# Altium PCB Driver PCB v1.0.PcbDoc
Units mil, origin at the board's own origin, x right, y up, seen from the top; angles counter-clockwise.
Board outline 6000 x 4000 mil, 2 copper layers (Top Layer, Bottom Layer); 18 components, 66 nets, 36 pads, 0 vias.
Unrouted connection lines stored in the file: 32.
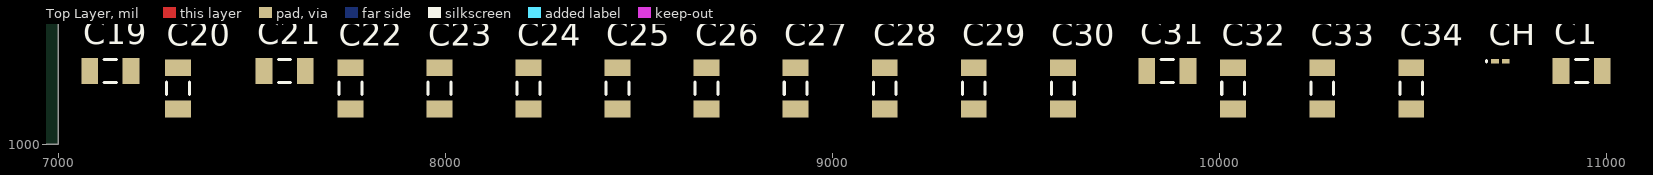
[diagram p0: Top Layer view]
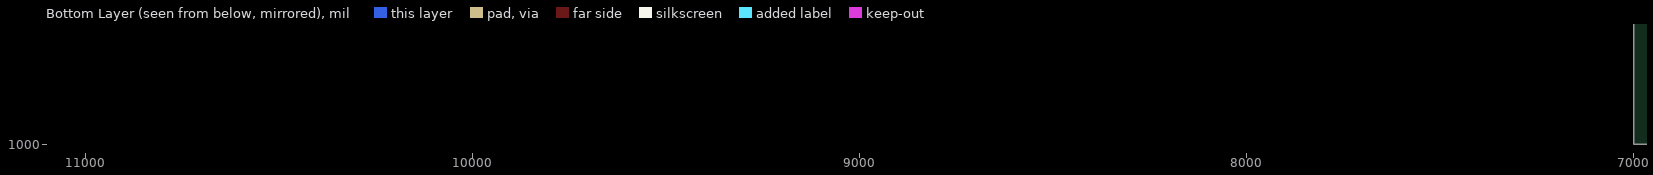
[diagram p1: Bottom Layer view, seen from below]

## Layer stack, top to bottom
Top Solder: solder mask 0.4, Solder Resist, Dk 3.5
Top Layer: signal copper 1.4
Dielectric 1: dielectric 12.6, FR-4, Dk 4.8
Bottom Layer: signal copper 1.4
Bottom Solder: solder mask 0.4, Solder Resist, Dk 3.5

## Board outline
1000,1000 7000,1000 7000,5000 1000,5000

## Design rules (kind name [scope] priority, off if disabled: settings)
Clearance [All] p1: gap=10 ignorepadtopadclearanceinfootprint=FALSE except(0: Arc-Hole Track-Hole SMDPad-Hole THPad-Hole Via-Hole Fill-Hole Poly-Hole Region-Hole Text-Hole)
PolygonConnect [All] p1: connectstyle=Relief reliefconductorwidth=10 reliefentries=4 polygonreliefangle="90 Angle" airgapwidth=10
RoomDefinition "Driver Schematic v1.1" [InComponentClass('Driver Schematic v1.1')] p1: confinementstyle=ConfineIn formatcopy=TRUE lockcomponents=FALSE outline 7045,1055 11025,1055 11025,1335 7045,1335
RoutingVias [All] p1: holewidth=28 width=50 viastyle="Through Hole" minholewidth=28 minwidth=50 maxholewidth=28 maxwidth=50
SolderMaskExpansion [All] p1: expansion=4 istentingtop=FALSE
Width [All] p1: maxlimit=10 minlimit=10 preferedwidth=10
30 further rules are at their usual default settings.

## Components (designator, comment, footprint, x,y, rotation, side; value= is the part's Value field where it differs from the comment)
C1 "10uF" C1206 10935,1190 r0 top
C19 "10uF" C1206 7135,1190 r0 top
C20 "10uF" C1206 7310,1145 r90 top
C21 "10uF" C1206 7585,1190 r0 top
C22 "10uF" C1206 7755,1145 r90 top
C23 "10uF" C1206 7985,1145 r90 top
C24 "10uF" C1206 8215,1145 r90 top
C25 "10uF" C1206 8445,1145 r90 top
C26 "10uF" C1206 8675,1145 r90 top
C27 "10uF" C1206 8905,1145 r90 top
C28 "10uF" C1206 9135,1145 r90 top
C29 "10uF" C1206 9365,1145 r90 top
C30 "10uF" C1206 9595,1145 r90 top
C31 "10uF" C1206 9865,1190 r0 top
C32 "10uF" C1206 10035,1145 r90 top
C33 "10uF" C1206 10265,1145 r90 top
C34 "10uF" C1206 10495,1145 r90 top
CH "600r" 0603 10725,1215 r0 top

## Footprints (in the part's own frame and the unit in brackets; to place one, negate y for a bottom-side part, rotate by r counter-clockwise, add the part's x,y. Pads: shape width x height; smd on the part's side, far side on the other; paste and mask are expansions set on the pad)
0603 [mm] "Chip Inductor, Body 0.6x0.3mm, IPC High Density"
  rect 0.5x0.3 smd: 1(-0.35,0) 2(0.35,0)
  silkscreen extent -0.9,-0.05 -0.9,0.05, body extent -0.33,-0.18 0.33,0.18, height 0.55
C1206 [mm] "Chip Capacitor, Body 3.2x1.6mm, IPC High Density"
  rect 1.1x1.7 smd: 1(-1.35,0) 2(1.35,0)
  silkscreen extent -0.4,-0.75 0.4,0.75, body extent -1.7,-0.9 1.7,0.9, height 1.3

## Nets (pads, with @x,y where several pads share a name; then routed paths per layer and width w, separated by ;. In a path a pad name is that pad's centre, name@x,y a point inside that pad or via, vN(x,y) a via of type N, cw(c..) or ccw(c..) an arc to the next point about the centre after c; other vN are vias at no path point)
3V3: CH.1
+5V: 
+24V: C1.1 C19.1 C20.1 C21.1 C22.1 C23.1 C24.1 C25.1 C26.1 C27.1 C28.1 C29.1 C30.1 C31.1 C32.1 C33.1 C34.1
CAL: 
GND: C1.2 C19.2 C20.2 C21.2 C22.2 C23.2 C24.2 C25.2 C26.2 C27.2 C28.2 C29.2 C30.2 C31.2 C32.2 C33.2 C34.2
I_A: 
I_B: 
MCO: 
NetC3_1: CH.2
NetC4_1: 
NetC4_2: 
NetC6_1: 
NetC6_2: 
NetC8_1: 
NetC11_2: 
NetC12_2: 
NetCAN1_1: 
NetCAN1_2: 
NetCAN1_3: 
NetLED1_1: 
NetLED2_1: 
NetPROG_1: 
NetPROG_2: 
NetPROG_4: 
NetPROG_5: 
NetPROG_6: 
NetPROG_7: 
NetQ1_1: 
NetQ1_4: 
NetQ2_1: 
NetQ2_4: 
NetQ3_1: 
NetQ3_4: 
NetQ4_1: 
NetQ4_4: 
NetQ5_1: 
NetQ5_4: 
NetQ6_4: 
NetR1_1: 
NetR2_1: 
NetR3_1: 
NetR4_1: 
NetR8_2: 
NetU1_1: 
NetU1_4: 
NetU2_6: 
NetU2_20: 
NetU2_21: 
NetU2_22: 
NetU2_23: 
NetU2_41: 
NetU2_42: 
NetU2_43: 
NetU2_44: 
NetU2_50: 
NetU2_51: 
NetU2_52: 
NetU2_53: 
NetU3_2: 
NetU3_6: 
NetU4_23: 
NetU4_24: 
NetU4_25: 
NetU4_30: 
NetU4_31: 
NRST: 